# Altium PCB PCB.PcbDoc
Units mm, origin at the board's own origin, x right, y up, seen from the top; angles counter-clockwise.
Board outline 35.81 x 28.83 mm, 4 copper layers (Top Layer, Internal Plane 1, Internal Plane 2, Bottom Layer); 14 components, 9 nets, 29 pads, 0 vias.
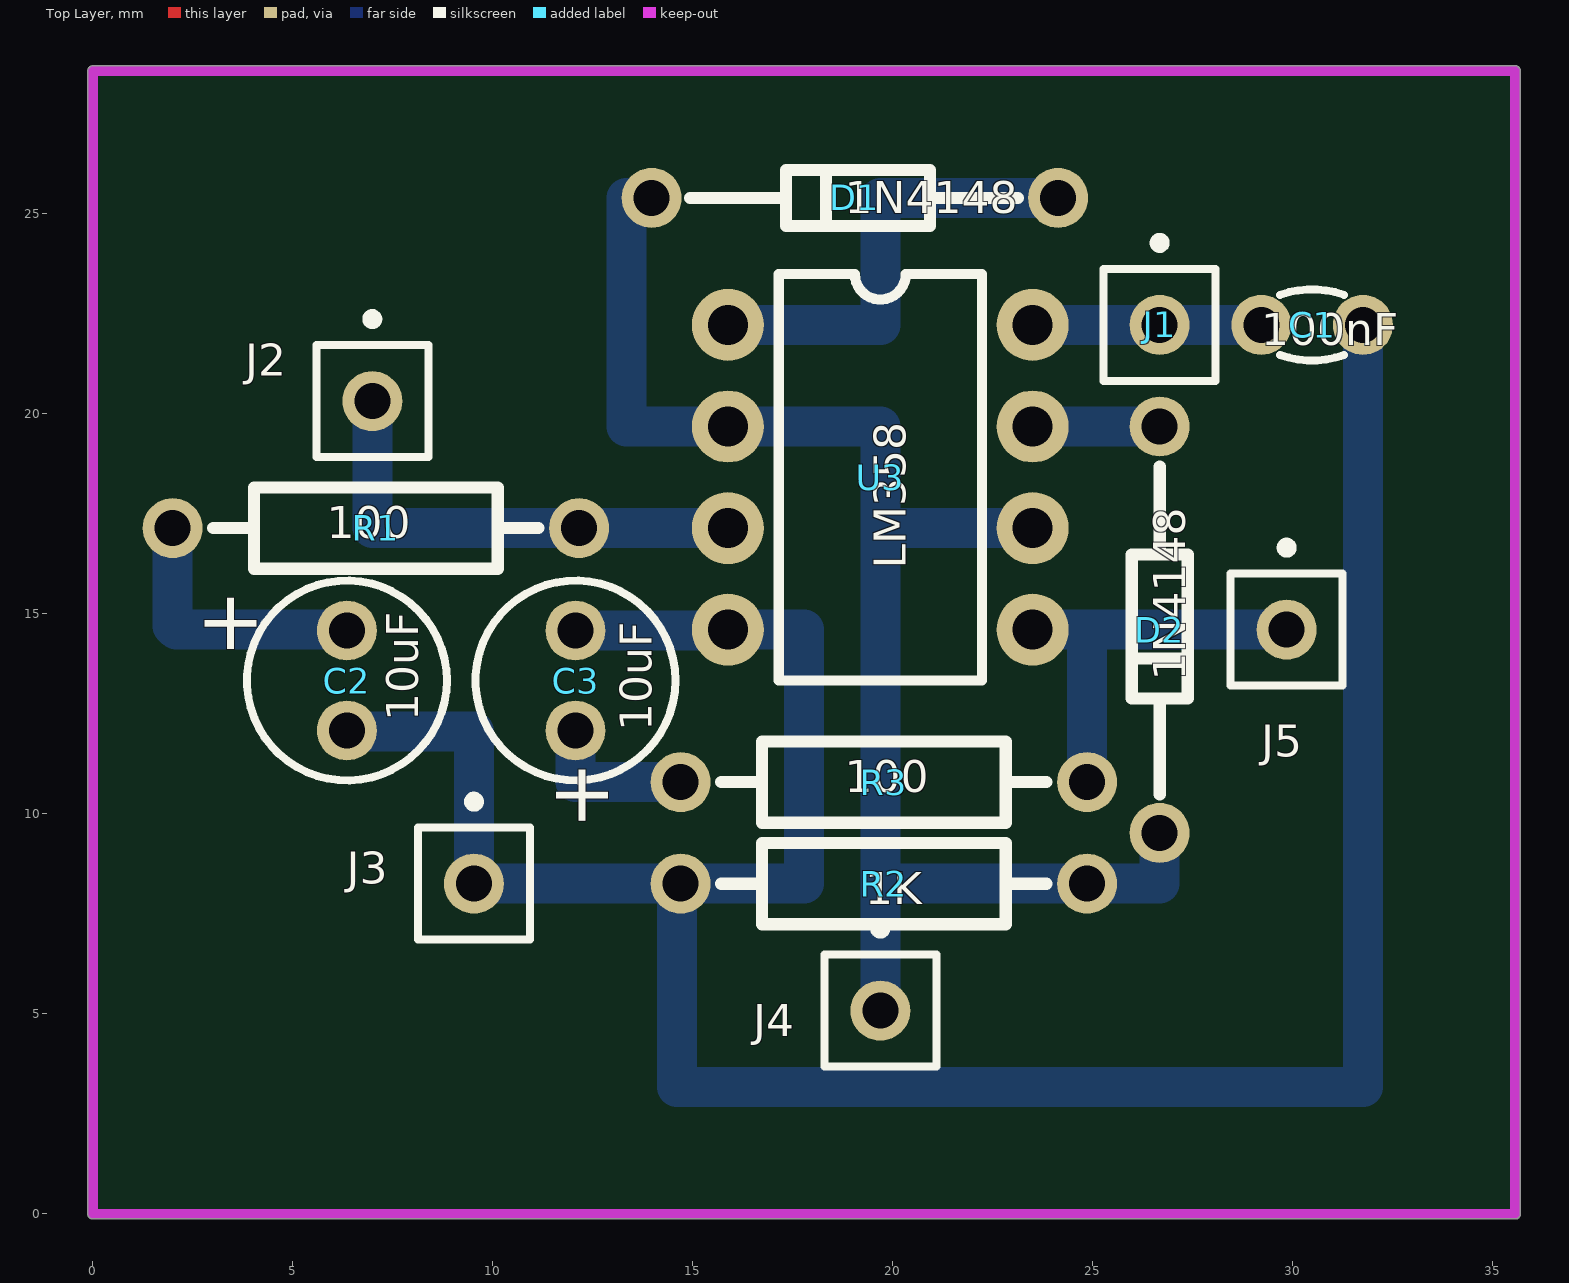
[diagram p0: Top Layer view]
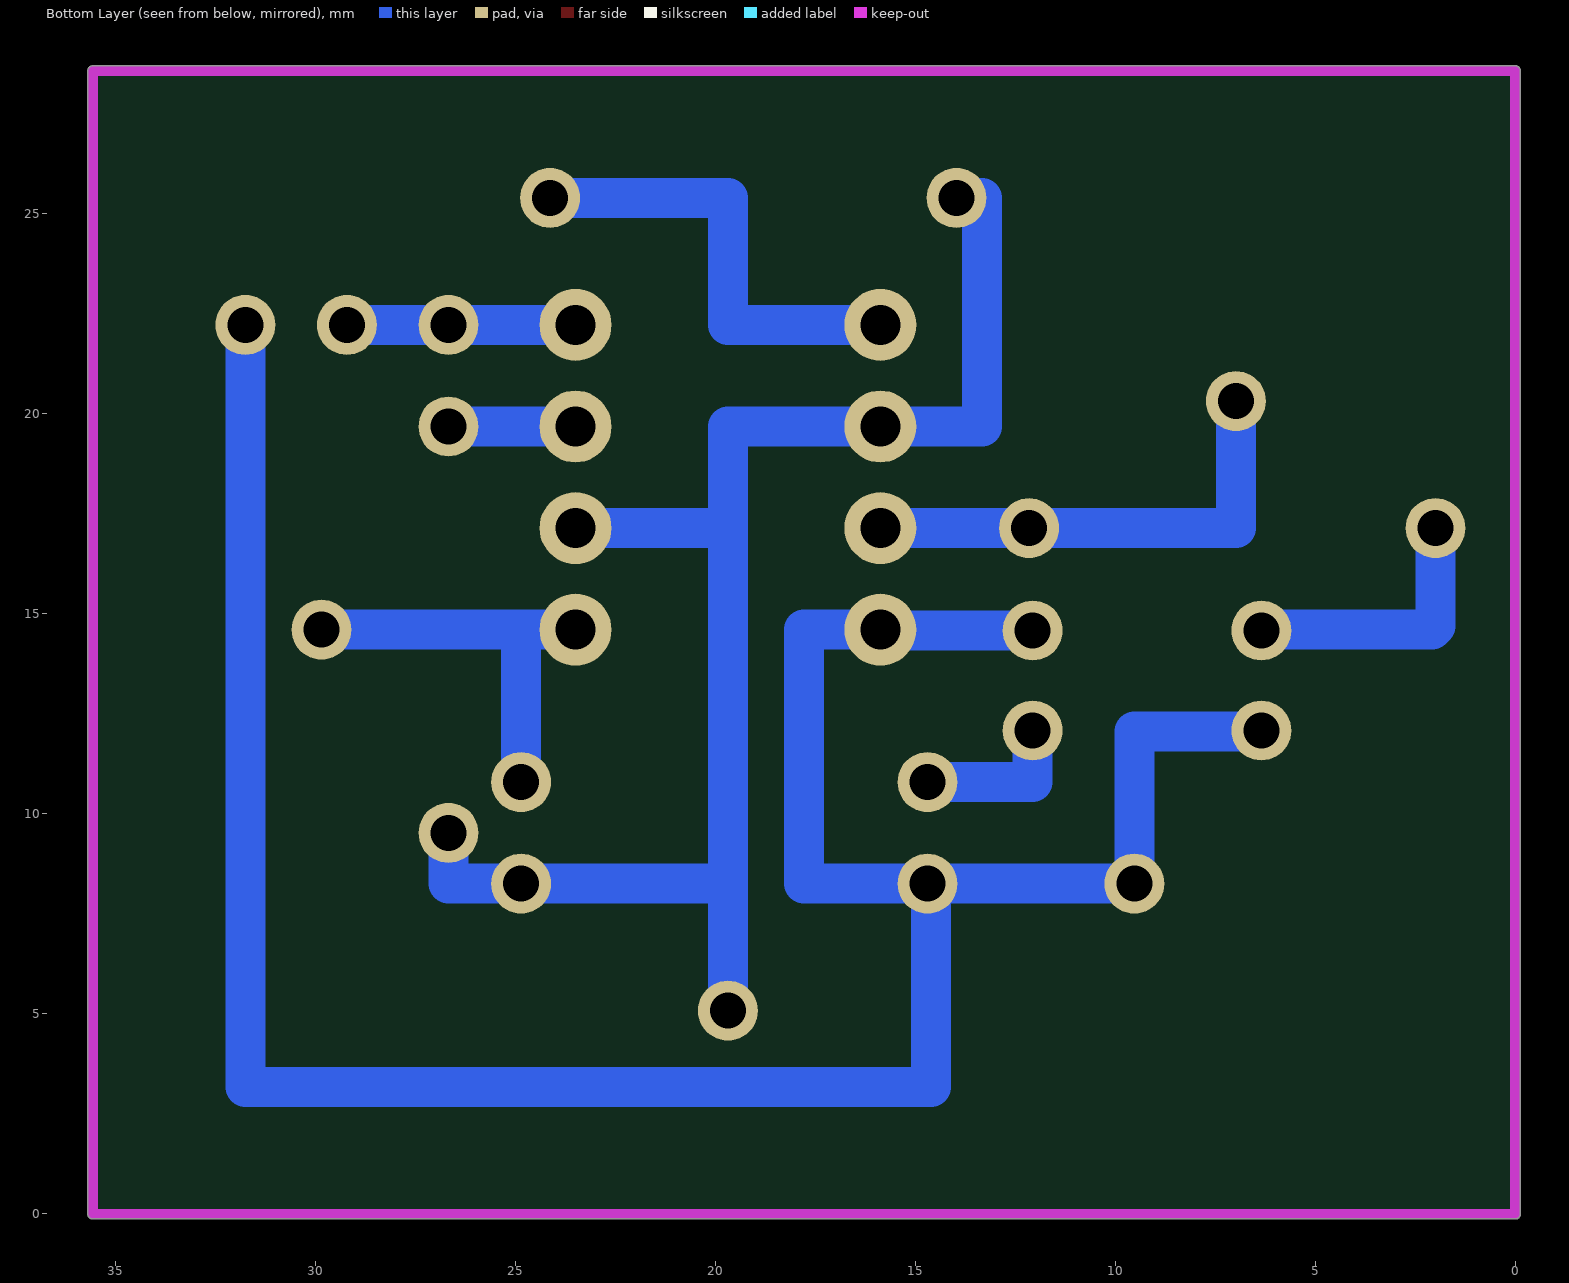
[diagram p1: Bottom Layer view, seen from below]
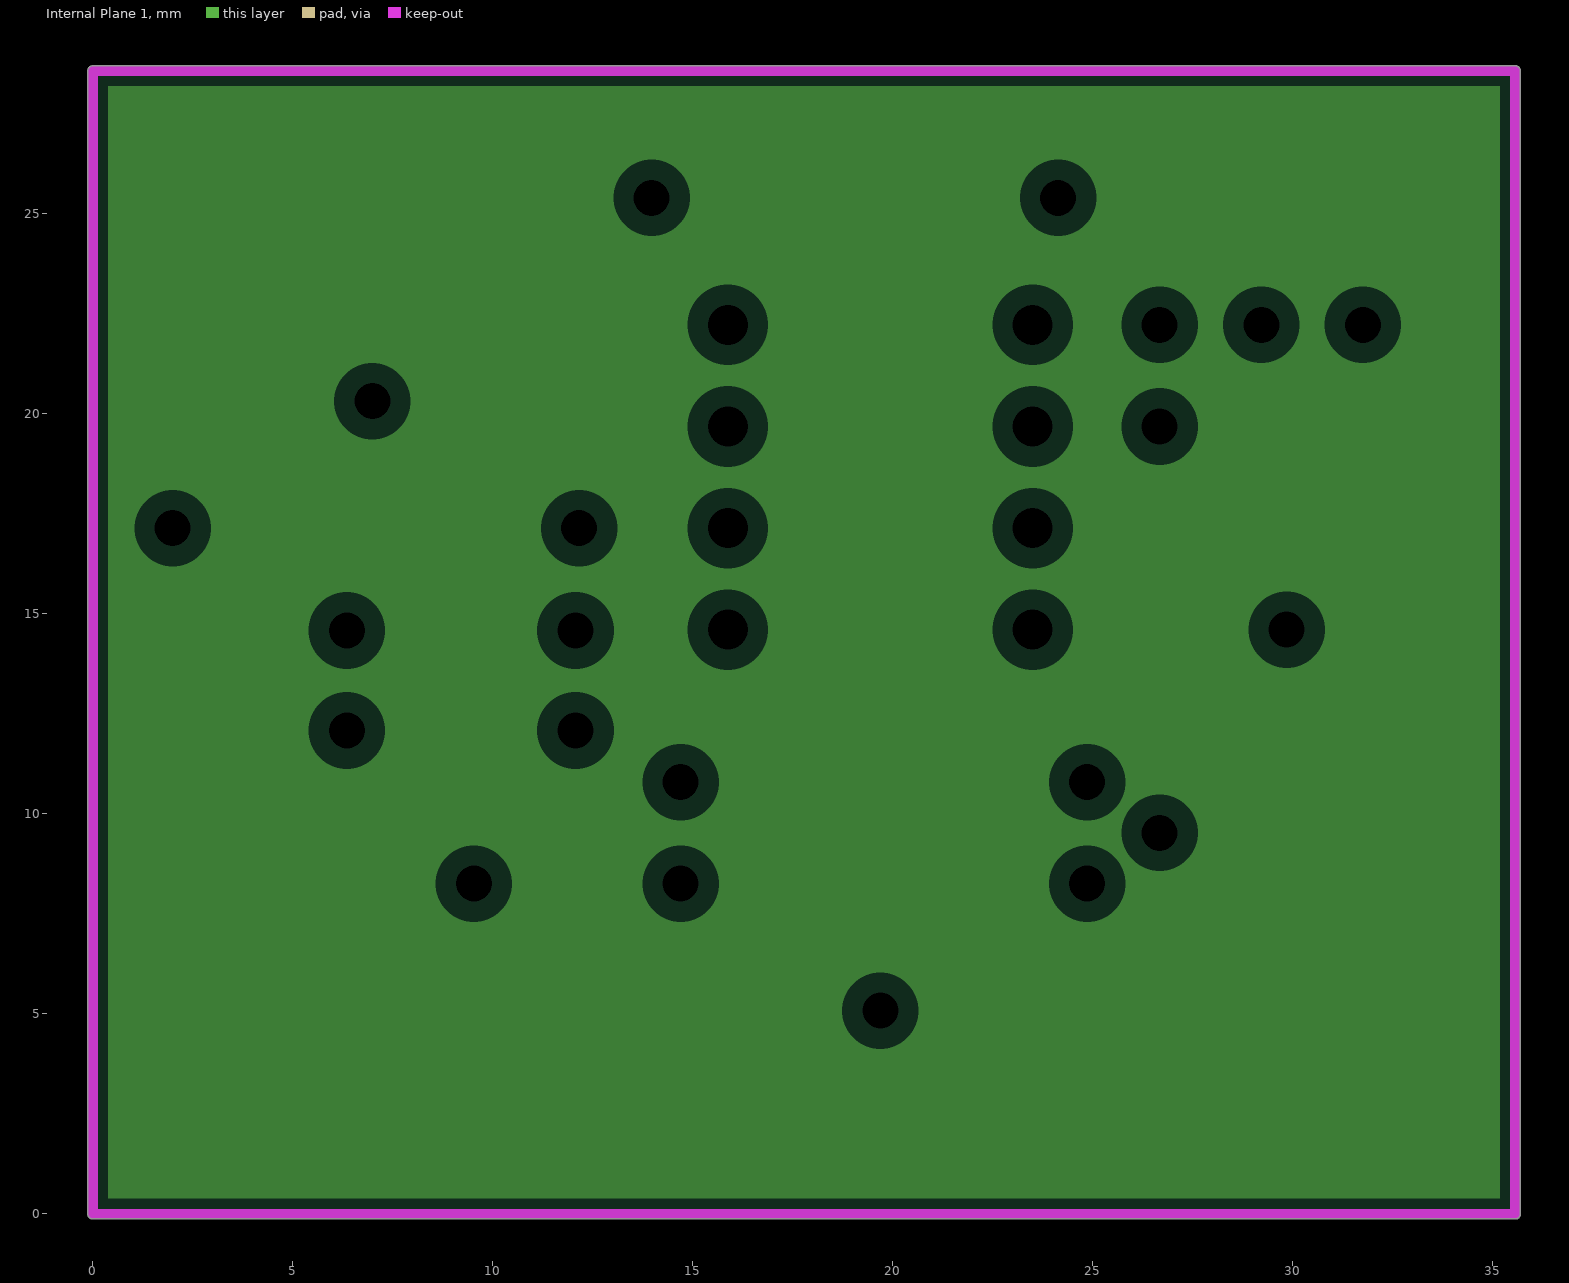
[diagram p2: Internal Plane 1, clearances drawn from the general rule]
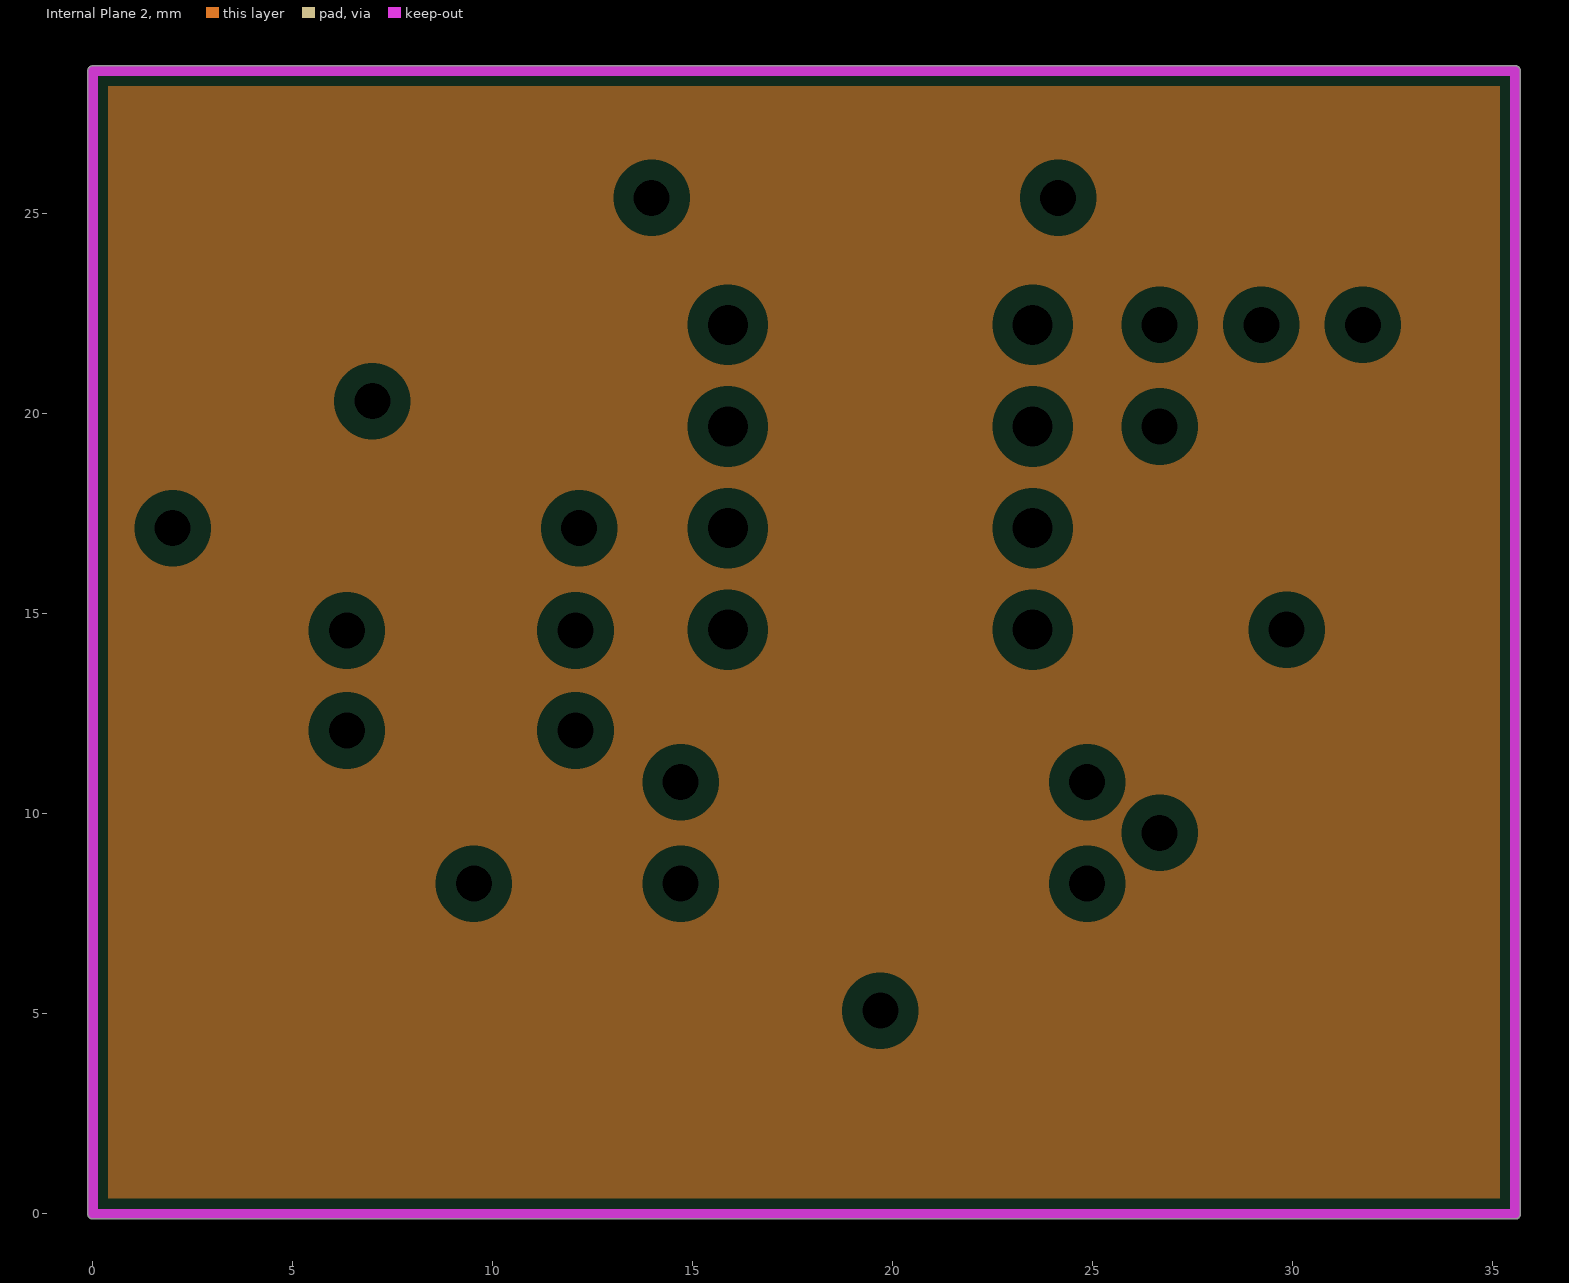
[diagram p3: Internal Plane 2, clearances drawn from the general rule]

## Layer stack, top to bottom
Top Solder: solder mask 0.0102, Solder Resist, Dk 3.5
Top Layer: signal copper 0.0356
Dielectric1: dielectric 0.32, FR-4, Dk 4.8
Internal Plane 1: plane copper 0.0356
Dielectric2: dielectric 0.32, FR-4, Dk 4.8
Internal Plane 2: plane copper 0.0356
Dielectric3: dielectric 0.32, FR-4, Dk 4.8
Bottom Layer: signal copper 0.0356
Bottom Solder: solder mask 0.0102, Solder Resist, Dk 3.5

## Board outline
0,-0.127 cw(c0,0) -0.127,0 -0.127,28.575 cw(c0,28.575) 0,28.702 35.56,28.702 cw(c35.56,28.575) 35.687,28.575 35.687,0 cw(c35.56,0) 35.56,-0.127

## Design rules (kind name [scope] priority, off if disabled: settings)
Clearance [All] p1: gap=0.6
ComponentClearance [All] p1: gap=0 collisioncheckmode=3 verticalgap=0 showdistances=FALSE
Height [All] p1: minheight=0 maxheight=50 prefheight=12.7
HoleSize [All] p1: absolutevalues=TRUE maxlimit=5 minlimit=0.025 maxpercent=80.000 minpercent=20.000
PlaneClearance [All] p1: clearance=0.508
PlaneConnect [All] p1: planeconnectstyle=Relief reliefexpansion=0.508 reliefentries=4 reliefconductorwidth=0.254 reliefairgap=0.254
PolygonConnect [All] p1: connectstyle=Relief reliefconductorwidth=0.254 reliefentries=4 polygonreliefangle="90 Angle" airgapwidth=0.254
RoutingVias [All] p1: holewidth=0.813 width=1.575 viastyle="Through Hole" minholewidth=0.711 minwidth=1.27 maxholewidth=0.711 maxwidth=1.27
SilkToSolderMaskClearance SilkscreenOverComponentPads [IsPad] p1: minsilkscreentomaskgap=0.254 clearancetoexposedcopper=TRUE
SolderMaskExpansion [All] p1: expansion=0.102
Width [All] p1: maxlimit=0.254 minlimit=0.254 preferedwidth=0.254
Width Width_VDD [InNet('VDD_2')] p2 off: maxlimit=0.3 minlimit=0.3 preferedwidth=0.3
24 further rules are at their usual default settings.

## Components (designator, comment, footprint, x,y, rotation, side; value= is the part's Value field where it differs from the comment)
C1 "100nF" CAPNTO2.54-3.05x1.78A 30.48,22.225 r180 top
C2 "10uF" CAPPR2.5-5x6 6.35,13.335 r270 top
C3 "10uF" CAPPR2.5-5x6 12.065,13.335 r90 top
D1 "1N4148" DIODE0.4_Glass 19.05,25.4 r180 top
D2 "1N4148" DIODE0.4_Glass 26.67,14.605 r270 top
J1 "COAX-F" PIN1 26.67,22.225 r0 top
J2 "COAX-F" PIN1 6.985,20.32 r0 top
J3 "COAX-M" PIN1 9.525,8.255 r0 top
J4 "COAX-M" PIN1 19.685,5.08 r0 top
J5 "COAX-F" PIN1 29.845,14.605 r0 top
R1 "100" AXIAL-0.4 8.255,17.145 r180 top
R2 "1K" AXIAL-0.4 20.955,8.255 r180 top
R3 "100" AXIAL-0.4 20.955,10.795 r180 top
U3 "LM358" DIP8 19.685,18.415 r0 top

## Footprints (in the part's own frame and the unit in brackets; to place one, negate y for a bottom-side part, rotate by r counter-clockwise, add the part's x,y. Pads: shape width x height; smd on the part's side, far side on the other; paste and mask are expansions set on the pad)
AXIAL-0.4 [mm]
  round 1.5 hole 0.9: 1(-3.9,0) 2(6.26,0)
  silkscreen extent -2.88,-1.02 5.24,1.02, body extent -4.19,-1.19 6.58,1.12, height 3.51
CAPNTO2.54-3.05x1.78A [mm] "Capacitor, Radial, Tantalum, Non-Polarised; Body 3.05 x 1.78 x 3.43 mm (WxTxH max); Pin Spacing 2.54 mm (typ)"
  round 1.5 hole 0.9: 1(-1.27,0) 2(1.27,0)
  silkscreen extent -0.8,-0.89 0.8,0.89
CAPPR2.5-5x6 [mm] "Capacitor, Electrolytic, Radial; Body 6.3 x 5 mm (Dia.xH typ); Pin Spacing 2.5 mm (typ)"
  round 1.5 hole 0.9: 1(-1.25,0) 2(1.25,0)
  silkscreen extent -2.5,-2.5 2.5,2.5
DIODE0.4_Glass [mm] "created by: M.Hariri (designer)"
  round 1.5 hole 0.9: 1(-5.08,0) 2(5.08,0)
  silkscreen extent -4.08,-0.7 4.12,0.7
DIP8 [mm]
  round 1.8 hole 1: 1(-3.81,3.81) 2(-3.81,1.27) 3(-3.81,-1.27) 4(-3.81,-3.81) 5(3.81,-3.81) 6(3.81,-1.27) 7(3.81,1.27) 8(3.81,3.81)
  silkscreen extent -2.54,-5.08 2.54,5.08
PIN1 [mm]
  round 1.5 hole 0.9: 1(0,0)
  silkscreen extent -1.4,-1.4 1.4,2.17

## Part data
C1: library part Cap, "Capacitor"
C2 C3: library part "Cap Pol1", "Polarized Capacitor (Radial)"
D1 D2: library part Diode, "Default Diode"
J1 J2 J5: "Coax-F Connector"
J3 J4: "Coax-M Connector"
R1 R2 R3: library part Res1, "Resistor"
U3: "Dual Low-Power Operational Amplifier"

## Nets (pads, with @x,y where several pads share a name; then routed paths per layer and width w, separated by ;. In a path a pad name is that pad's centre, name@x,y a point inside that pad or via, vN(x,y) a via of type N, cw(c..) or ccw(c..) an arc to the next point about the centre after c; other vN are vias at no path point)
+15V: C1.2 J1.1 U3.8 | length 5.7
  Bottom Layer w1: U3.8 J1.1 C1.2
GND: C1.1 C2.2 C3.2 J3.1 R2.2 U3.4 | length 68.6
  Bottom Layer w1: C2.2@6.35,12.065 9.525,12.065 J3.1 R2.2@14.605,8.255 ; C3.2 U3.4@15.855,14.585 ; U3.4 17.78,14.605 17.78,8.255 R2.2 R2.2@14.605,8.255 ; C1.1 31.75,3.175 14.605,3.175 R2.2@14.605,8.255
NetC2_1: C2.1 R1.2 | length 6.8
  Bottom Layer w1: R1.2 1.995,14.695 2.085,14.605 C2.1@6.35,14.605
NetC3_1: C3.1 R3.2 | length 3.9
  Bottom Layer w1: C3.1@12.065,12.065 12.065,10.795 R3.2
NetD1_1: D1.1 U3.1 | length 11.4
  Bottom Layer w1: U3.1 19.685,22.225 19.685,25.4 D1.1
NetD1_2: D1.2 D2.2 J4.1 R2.1 U3.2 U3.6 | length 39.4
  Bottom Layer w1: D1.2 13.335,25.4 13.335,19.685 U3.2 19.685,19.685 19.685,17.145 ; J4.1 19.685,8.255 ; U3.6 19.685,17.145 ; D2.2 26.67,8.255 R2.1 19.685,8.255 ; 19.685,8.255 19.685,17.145
NetD2_1: D2.1 U3.7 | length 3.2
  Bottom Layer w1: U3.7 D2.1
NetJ2_1: J2.1 R1.1 U3.3 | length 12.1
  Bottom Layer w1: J2.1 6.985,17.145 R1.1 U3.3
NetJ5_1: J5.1 R3.1 U3.5 | length 10.1
  Bottom Layer w1: U3.5 J5.1 ; R3.1 24.855,14.515

## Polygon pours and split planes (outlines as drawn)
no net on Internal Plane 1 (split plane): 35.177,0.383 0.383,0.383 0.383,28.192 35.177,28.192
no net on Internal Plane 2 (split plane): 35.177,0.383 0.383,0.383 0.383,28.192 35.177,28.192

## Keep-outs
Keep-Out Layer:
  lines w0.254: 0,0 0,28.575 35.56,28.575 35.56,0 0,0

## Text inside footprints (layer, text, board x,y; h text height)
C2: Top Overlay "+" at 2.794,15.621 h1.5 r270
C3: Top Overlay "+" at 12.878,9.601 h1.5 r90